# Altium PCB mainboard.PcbDoc
Units mil, origin at the board's own origin, x right, y up, seen from the top; angles counter-clockwise.
Board outline 6000 x 4000 mil, 2 copper layers (Top Layer, Bottom Layer); 2 components, 48 nets, 131 pads, 16 vias.
Unrouted connection lines stored in the file: 38.
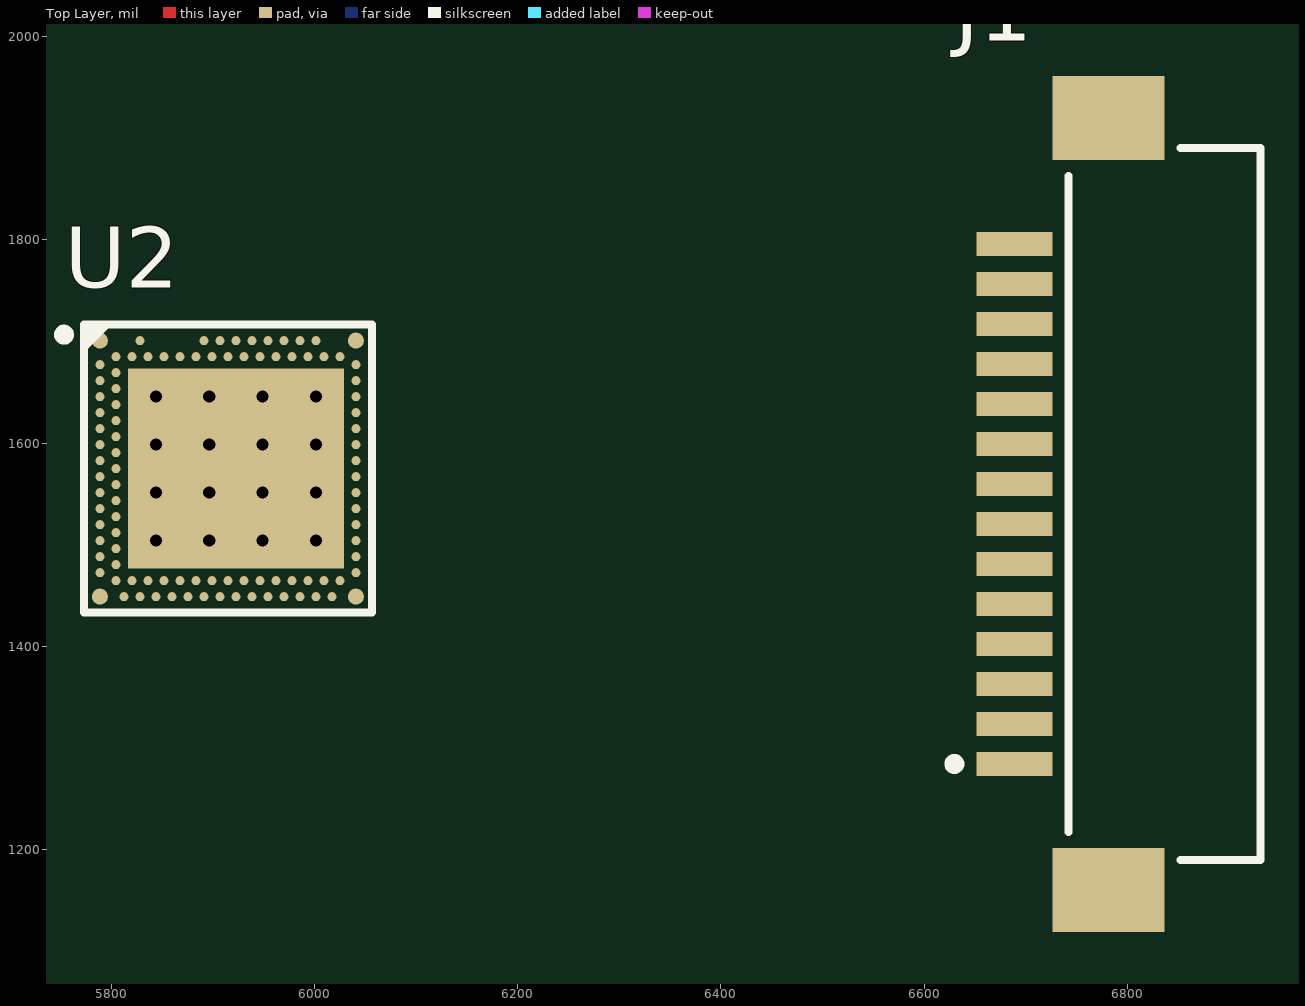
[diagram p0: Top Layer view]
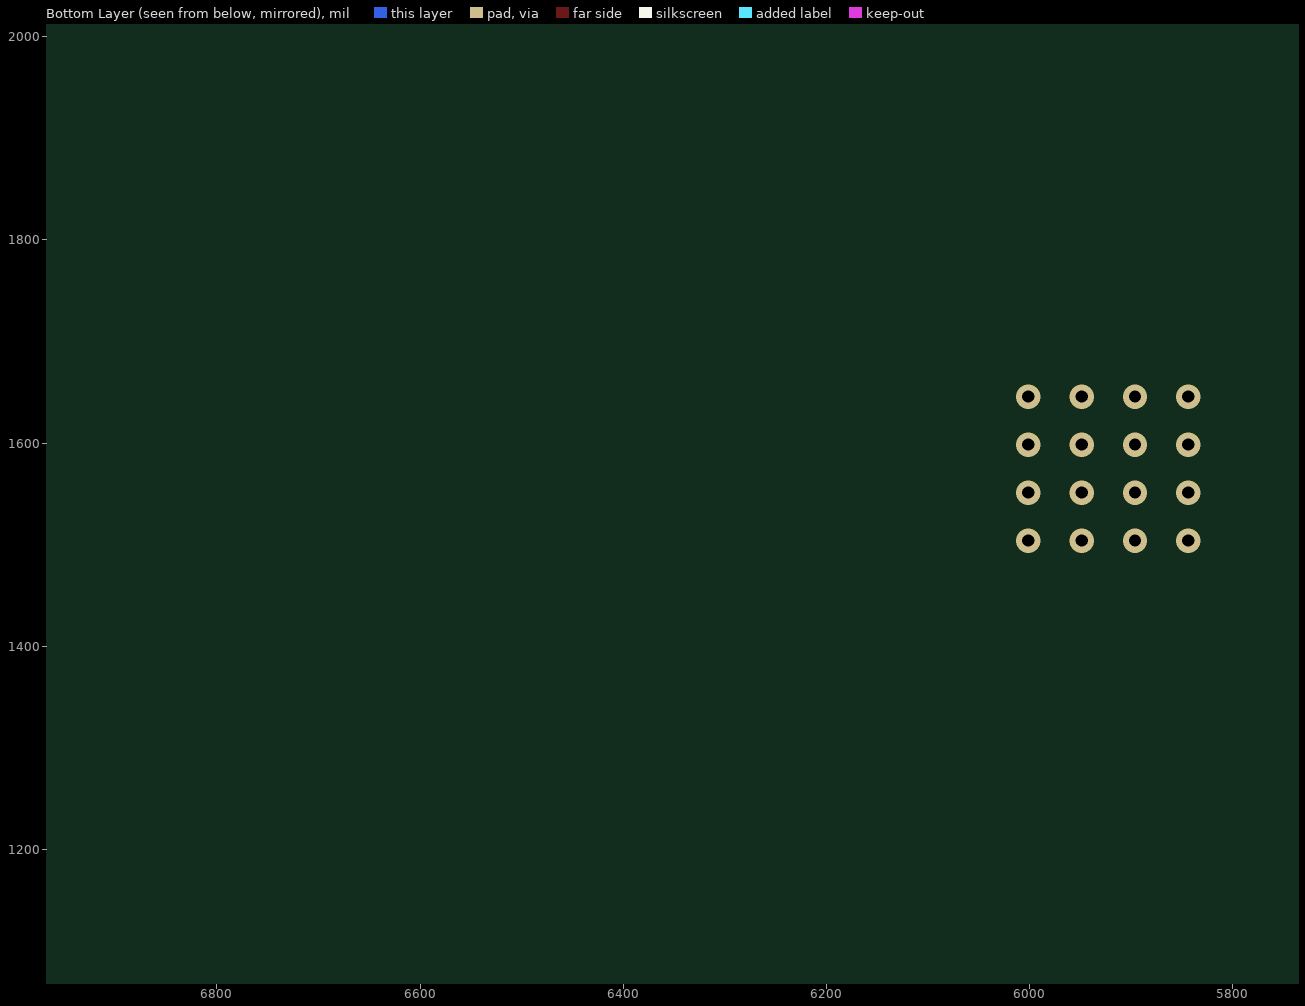
[diagram p1: Bottom Layer view, seen from below]

## Layer stack, top to bottom
Top Solder: solder mask 0.4, Solder Resist, Dk 3.5
Top Layer: signal copper 1.4
Dielectric 1: dielectric 12.6, FR-4, Dk 4.8
Bottom Layer: signal copper 1.4
Bottom Solder: solder mask 0.4, Solder Resist, Dk 3.5

## Board outline
1000,1000 7000,1000 7000,5000 1000,5000

## Design rules (kind name [scope] priority, off if disabled: settings)
Clearance [All] p1: gap=10 ignorepadtopadclearanceinfootprint=FALSE
DiffPairsRouting [All] p1: maxlimit=10 minlimit=10 mostfreqgap=10 toplayer_minwidth=15 toplayer_maxwidth=15 toplayer_prefwidth=15 bottomlayer_minwidth=15 bottomlayer_maxwidth=15 bottomlayer_prefwidth=15 maxuncoupledlength=500
PolygonConnect [All] p1: connectstyle=Relief reliefconductorwidth=10 reliefentries=4 polygonreliefangle="90 Angle" airgapwidth=10
RoutingVias [All] p1: holewidth=28 width=50 viastyle="Through Hole" minholewidth=28 minwidth=50 maxholewidth=28 maxwidth=50
SolderMaskExpansion [All] p1: expansion=0 istentingtop=FALSE
SupplyNets "Schematic Supply Nets_3" [InNet('VBUS')] p1: voltage=0.000
SupplyNets "Schematic Supply Nets_2" [InNet('AGND')] p2: voltage=0.000
SupplyNets "Schematic Supply Nets_1" [InNet('DB_AVDD')] p3: voltage=0.000
SupplyNets "Schematic Supply Nets" [InNet('VDD_HV')] p4: voltage=0.000
Width [All] p1: maxlimit=10 minlimit=10 preferedwidth=10
29 further rules are at their usual default settings.

## Classes and differential pairs
differential pair D: +D_P -D_N

## Components (designator, comment, footprint, x,y, rotation, side; value= is the part's Value field where it differs from the comment)
J1 "52793-1470" MOLX-52793-1470 6735,1540 r90 top
U2 "nRF5340-QKAA" AQFN40P700X700X85_HS-99N 5914.76,1574.76 r0 top

## Footprints (in the part's own frame and the unit in brackets; to place one, negate y for a bottom-side part, rotate by r counter-clockwise, add the part's x,y. Pads: shape width x height; smd on the part's side, far side on the other; paste and mask are expansions set on the pad)
AQFN40P700X700X85_HS-99N [mm] "AQFN, 98-Leads, Body 7.00x7.00mm, Pitch 0.40mm, Thermal Pad 5.4x5.0mm, IPC Medium Density"
  rect 5.4x5 smd paste-5: 104(0.2,0)
  round 0.4 smd paste+0.012: A1(-3.2,3.2) A31(3.2,3.2) AL1(-3.2,-3.2) AL31(3.2,-3.2)
  round 0.225 smd paste+0.012: A5(-2.2,3.2) A13(-0.6,3.2) A15(-0.2,3.2) A17(0.2,3.2) A19(0.6,3.2) A21(1,3.2) A23(1.4,3.2) A25(1.8,3.2) A27(2.2,3.2) AA1(-3.2,-1) AA31(3.2,-1) AB2(-2.8,-1.2) AC1(-3.2,-1.4) AC31(3.2,-1.4) AD2(-2.8,-1.6) AE1(-3.2,-1.8) AE31(3.2,-1.8) AF2(-2.8,-2) AG1(-3.2,-2.2) AG31(3.2,-2.2) AH2(-2.8,-2.4) AJ1(-3.2,-2.6) AJ31(3.2,-2.6) AK2(-2.8,-2.8) AK4(-2.4,-2.8) AK6(-2,-2.8) AK8(-1.6,-2.8) AK10(-1.2,-2.8) AK12(-0.8,-2.8) AK14(-0.4,-2.8) AK16(0,-2.8) AK18(0.4,-2.8) AK20(0.8,-2.8) AK22(1.2,-2.8) AK24(1.6,-2.8) AK26(2,-2.8) AK28(2.4,-2.8) AK30(2.8,-2.8) AL3(-2.6,-3.2) AL5(-2.2,-3.2) AL7(-1.8,-3.2) AL9(-1.4,-3.2) AL11(-1,-3.2) AL13(-0.6,-3.2) AL15(-0.2,-3.2) AL17(0.2,-3.2) AL19(0.6,-3.2) AL21(1,-3.2) AL23(1.4,-3.2) AL25(1.8,-3.2) AL27(2.2,-3.2) AL29(2.6,-3.2) B2(-2.8,2.8) B4(-2.4,2.8) B6(-2,2.8) B8(-1.6,2.8) B10(-1.2,2.8) B12(-0.8,2.8) B14(-0.4,2.8) B16(0,2.8) B18(0.4,2.8) B20(0.8,2.8) B22(1.2,2.8) B24(1.6,2.8) B26(2,2.8) B28(2.4,2.8) B30(2.8,2.8) C1(-3.2,2.6) C31(3.2,2.6) D2(-2.8,2.4) E1(-3.2,2.2) E31(3.2,2.2) F2(-2.8,2) G1(-3.2,1.8) G31(3.2,1.8) H2(-2.8,1.6) J1(-3.2,1.4) J31(3.2,1.4) K2(-2.8,1.2) L1(-3.2,1) L31(3.2,1) M2(-2.8,0.8) N1(-3.2,0.6) N31(3.2,0.6) P2(-2.8,0.4) R1(-3.2,0.2) R31(3.2,0.2) T2(-2.8,0) U1(-3.2,-0.2) U31(3.2,-0.2) V2(-2.8,-0.4) W1(-3.2,-0.6) W31(3.2,-0.6) Y2(-2.8,-0.8)
  rrect15% 1.1x1 on Top Paste: ""(-1.75,-1.8) ""(-1.75,-0.6) ""(-1.75,0.6) ""(-1.75,1.8) ""(-0.45,-1.8) ""(-0.45,-0.6) ""(-0.45,0.6) ""(-0.45,1.8) ""(0.85,-1.8) ""(0.85,-0.6) ""(0.85,0.6) ""(0.85,1.8) ""(2.15,-1.8) ""(2.15,-0.6) ""(2.15,0.6) ""(2.15,1.8)
  silkscreen extent -4.22,-3.6 3.6,3.6, body extent -3.5,-3.5 3.5,3.5, height 0.85
MOLX-52793-1470 [mm] "FFC Connector, 14-Leads, Right Angle, Pitch 1.0 mm, Mated Height 3.1 mm, SMT"
  rect 0.6x1.9 smd: 1(-6.5,1.175) 2(-5.5,1.175) 3(-4.5,1.175) 4(-3.5,1.175) 5(-2.5,1.175) 6(-1.5,1.175) 7(-0.5,1.175) 8(0.5,1.175) 9(1.5,1.175) 10(2.5,1.175) 11(3.5,1.175) 12(4.5,1.175) 13(5.5,1.175) 14(6.5,1.175)
  rect 2.1x2.8 smd: MP1(-9.65,-1.175) MP2(9.65,-1.175)
  silkscreen extent -8.9,-4.97 8.9,2.8, body extent -10.15,-4.97 10.15,1.82, height 3.1

## Part data
J1: library part CMP-1241-00393-1, "1.0 mm Pitch Easy-On(TM) Type FFC Connector, 3.1 mm Mated Height, Right Angle, Non-ZIF, SMT, Top Contact, 14 Circuits, -20 to 85 degC, ELV and RoHS Compliant, Tape and Reel", Current (Max per Contact)=0.5A, Manufacturer=Molex, Voltage (Max)=50V, Circuits (Loaded)=14, ComponentLink1Description="Manufacturer URL", ComponentLink1URL=http://www.molex.com/molex/index.jsp, ComponentLink2Description=Datasheet, ComponentLink2URL=http://www.molex.com/webdocs/datasheets/pdf/en-us/0527931470_FFC_FPC_CONNECTORS.pdf, ComponentLink3Description="Package Specification", ComponentLink3URL=http://www.molex.com/pdm_docs/sd/527931470_sd.pdf, Contact Position=Top, Durability (mating cycles max)=10, Entry Angle="90degrees Angle", Mated Height=3.10mm, Material - Metal="Phosphor Bronze", Material - Plating Mating=Tin-Bismuth, Material - Plating Termination=Tin-Bismuth, Mounting Technology="Surface Mount", Number of Rows=1, Orientation="Right Angle", PackageDescription="14-Lead FFC Connector, Pitch 1.0 mm", PackageReference=52793-1470, PackageVersion="Rev. 0, 12/2003", Packing="Tape and Reel", PartNumber=52793-1470, PCB Locator=No, PCB Retention=Yes, Pitch - Mating Interface=1.00mm, Pitch - Termination Interface=1.00mm, Polarized to PCB=No, RoHS=TRUE, Stackable=No
U2: "Multi-protocol Bluetooth Low Energy, IEEE 802.15.4, ANT and 2.4GHz proprietary system-on-chip", Component Class=nRF_Devices, Footprint Doc=AQFN-98, Pad Count=98

## Via types
v1: diameter 24, hole 12, Top Layer to Bottom Layer, 16 vias

## Nets (pads, with @x,y where several pads share a name; then routed paths per layer and width w, separated by ;. In a path a pad name is that pad's centre, name@x,y a point inside that pad or via, vN(x,y) a via of type N, cw(c..) or ccw(c..) an arc to the next point about the centre after c; other vN are vias at no path point)
AGND: J1.1 J1.3 J1.5 J1.13 J1.14 J1.MP1 J1.MP2 U2.104 U2.A25 U2.B12 U2.B26 U2.G1 U2.H2 U2.J31
  other v1: 5843.9,1503.9 5896.39,1503.9 5948.88,1503.9 6001.38,1503.9 5843.9,1551.14 5896.39,1551.14 5948.88,1551.14 6001.38,1551.14 5843.9,1598.39 5896.39,1598.39 5948.88,1598.39 6001.38,1598.39 5843.9,1645.63 5896.39,1645.63 5948.88,1645.63 6001.38,1645.63
ANT: U2.L31
D_N: U2.B4
D_P: U2.B2
DB_AVDD: J1.2 J1.4 U2.A19 U2.AC1 U2.AG1 U2.AJ31 U2.AL3 U2.AL7 U2.AL11 U2.AL17 U2.AL25 U2.B8 U2.B28 U2.C1 U2.E31 U2.L1 U2.N31 U2.U1
DB_START_AFE: J1.12 U2.AL19
DB_~CS_AFE: J1.9 U2.AK24
DB_~DRDY_AFE: J1.10 U2.AL21
DB_~RESET_AFE: J1.11 U2.AK22
IN1N: 
IN1P: 
IN2N: 
IN2P: 
IN3N: 
IN3P: 
IN4N: 
IN4P: 
MB_START_AFE: U2.AL23
MB_~CS_AFE: U2.B20
MB_~DRDY_AFE: U2.R31
MB_~RESET_AFE: U2.AK26
MISO: J1.8 U2.AF2
MOSI: J1.7 U2.AE1
NetC1_1: 
NetC4_1: 
NetC5_1: 
NetC6_1: 
NetC12_2: U2.A27 U2.G31
NetC19_2: U2.A15
NetC24_2: U2.A5
NetC25_2: U2.B6
NetC26_2: U2.A23
NetC27_2: U2.A13
NetL1_2: U2.A21
NetL2_2: U2.B10
NetL4_2: U2.J1
NetR2_2: 
R\E\S\E\T\: U2.AC31
RF: 
RLDIN: 
SCK: J1.6 U2.P2
SWDCLK: U2.W31
SWDIO: U2.AA31
VBUS: 
VDD_HV: U2.E1
XC1: U2.C31
XC2: U2.B30
~CS_IMU: U2.B18
pads on no net: U2. U2.A1 U2.A17 U2.A31 U2.AA1 U2.AB2 U2.AD2 U2.AE31 U2.AG31 U2.AH2 U2.AJ1 U2.AK2 U2.AK4 U2.AK6 U2.AK8 U2.AK10 U2.AK12 U2.AK14 U2.AK16 U2.AK18 U2.AK20 U2.AK28 U2.AK30 U2.AL1 U2.AL5 U2.AL9 U2.AL13 U2.AL15 U2.AL27 U2.AL29 U2.AL31 U2.B14 U2.B16 U2.B22 U2.B24 U2.D2 U2.F2 U2.K2 U2.M2 U2.N1 U2.R1 U2.T2 U2.U31 U2.V2 U2.W1 U2.Y2